# Altium PCB IPO1_V0.01-Pannel.PcbDoc
Units mm, origin at the board's own origin, x right, y up, seen from the top; angles counter-clockwise.
Board outline 159.77 x 279.4 mm, 2 copper layers (Top Layer, Bottom Layer); 6 components, 0 nets, 24 pads, 4 vias.
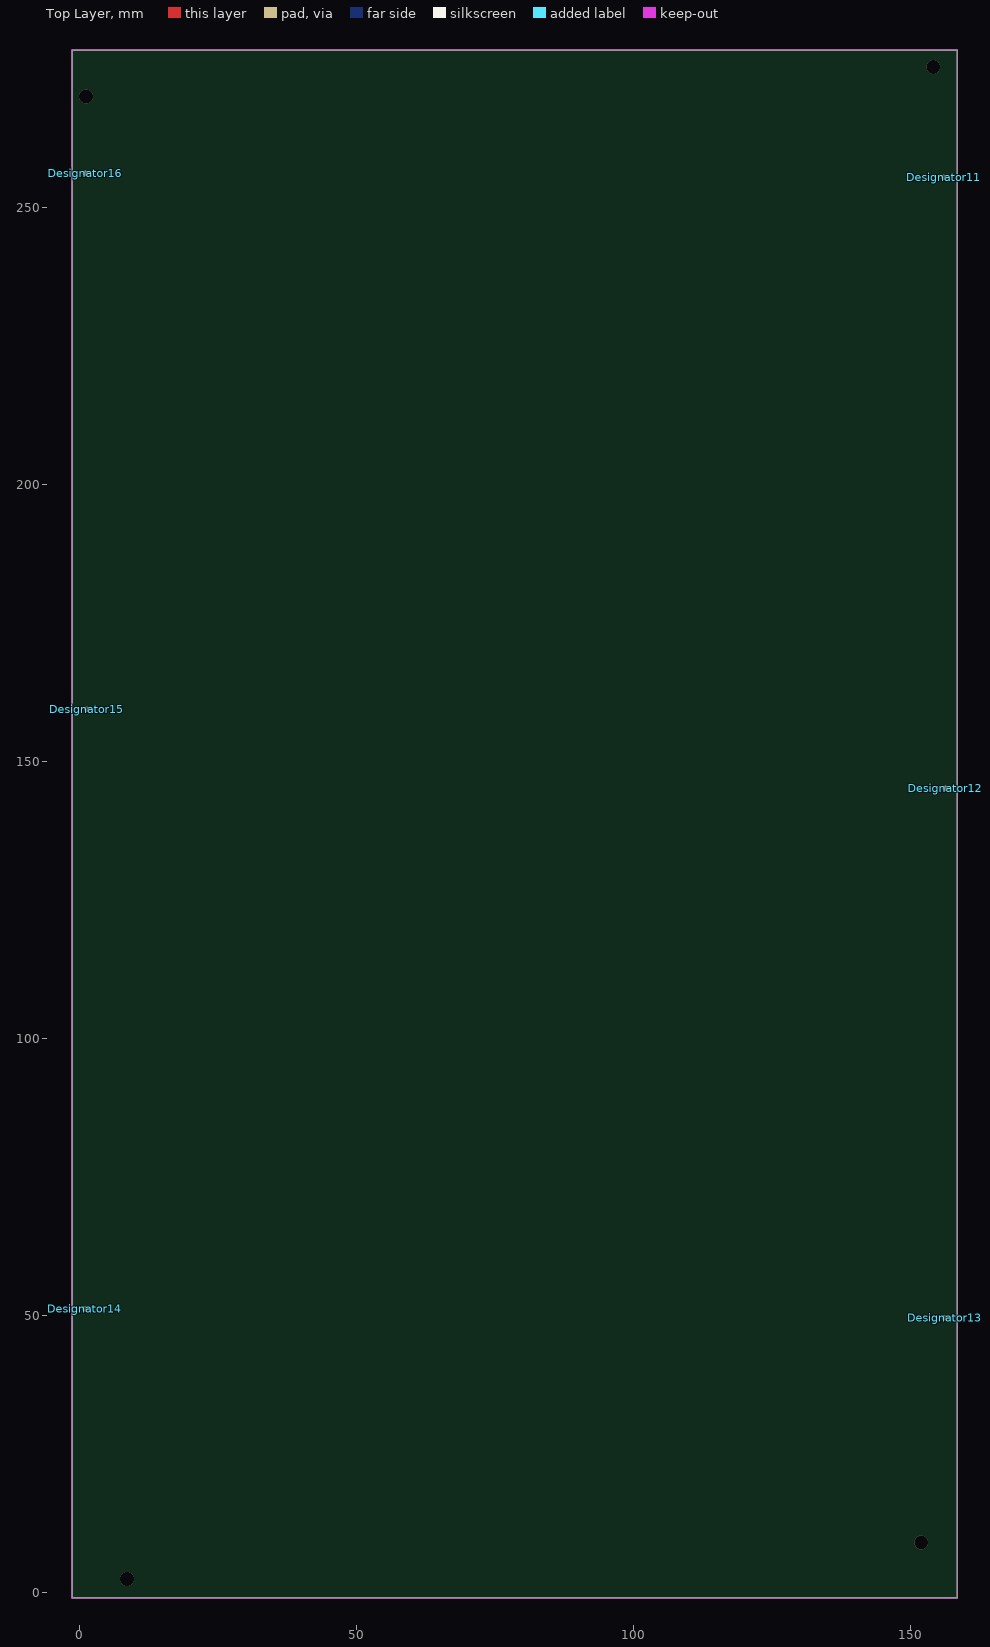
[diagram p0: Top Layer view]
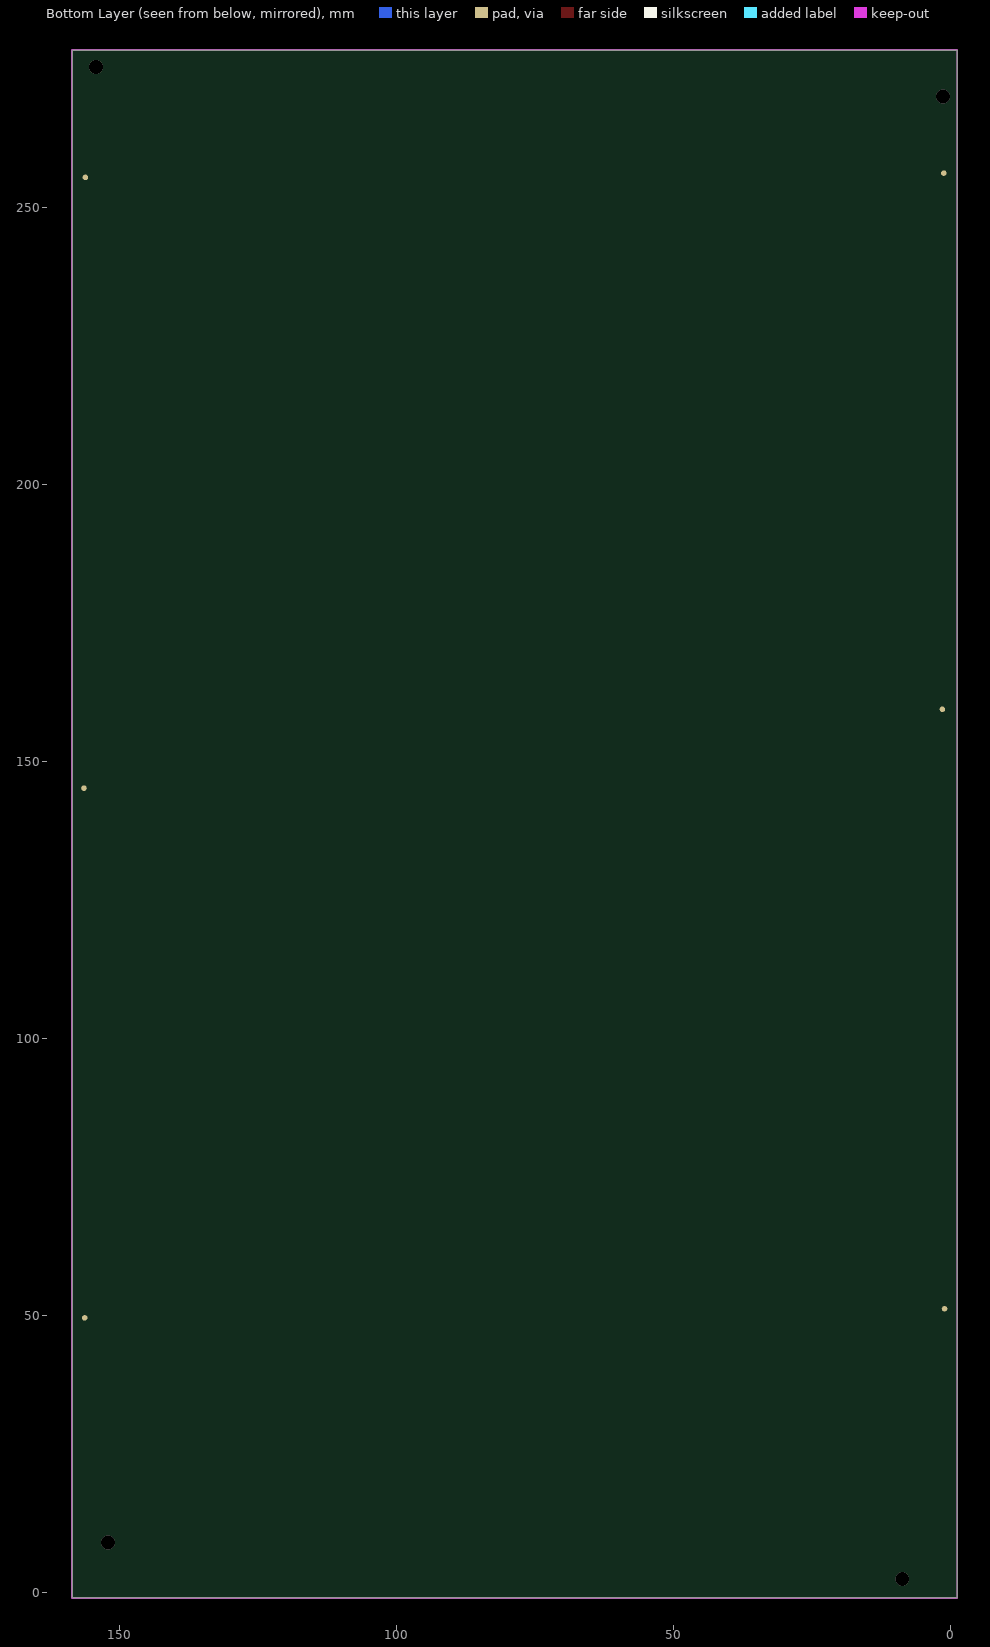
[diagram p1: Bottom Layer view, seen from below]

## Layer stack, top to bottom
Top Solder: solder mask 0.0102, Solder Resist, Dk 3.5
Top Layer: signal copper 0.0356
Dielectric 1: dielectric 0.32, FR-4, Dk 4.8
Bottom Layer: signal copper 0.0356
Bottom Solder: solder mask 0.0102, Solder Resist, Dk 3.5

## Board outline
-1.27,-1.016 -1.27,278.384 158.496,278.384 158.496,-1.016

## Design rules (kind name [scope] priority, off if disabled: settings)
Clearance [All] p1: gap=0.254 ignorepadtopadclearanceinfootprint=FALSE except(0: Arc-Hole Track-Hole SMDPad-Hole THPad-Hole Via-Hole Fill-Hole Poly-Hole Region-Hole Text-Hole)
PolygonConnect [All] p1: connectstyle=Relief reliefconductorwidth=0.254 reliefentries=4 polygonreliefangle="90 Angle" airgapwidth=0.254
RoutingVias [All] p1: holewidth=0.711 width=1.27 viastyle="Through Hole" minholewidth=0.711 minwidth=1.27 maxholewidth=0.711 maxwidth=1.27
SolderMaskExpansion [All] p1: expansion=0.102 istentingtop=FALSE
Width [All] p1: maxlimit=0.254 minlimit=0.254 preferedwidth=0.254
30 further rules are at their usual default settings.

## Components (designator, comment, footprint, x,y, rotation, side; value= is the part's Value field where it differs from the comment)
Designator11 "Comment" Fiducial-2layer 156.083,255.397 r0 top
Designator12 "Comment" Fiducial-2layer 156.337,145.161 r0 top
Designator13 "Comment" Fiducial-2layer 156.21,49.53 r0 top
Designator14 "Comment" Fiducial-2layer 1.016,51.181 r0 top
Designator15 "Comment" Fiducial-2layer 1.397,159.385 r0 top
Designator16 "Comment" Fiducial-2layer 1.143,256.159 r0 top

## Footprints (in the part's own frame and the unit in brackets; to place one, negate y for a bottom-side part, rotate by r counter-clockwise, add the part's x,y. Pads: shape width x height; smd on the part's side, far side on the other; paste and mask are expansions set on the pad)
Fiducial-2layer [mm]
  round 1 smd paste-1 mask+0.8: 25(0,0) 25(0,0)
  round 1 smd far side paste-1 mask+0.8: 25(0,0) 25(0,0)

## Via types
v1: diameter 2.5, hole 2.5, Top Layer to Bottom Layer, 4 vias

## Nets (pads, with @x,y where several pads share a name; then routed paths per layer and width w, separated by ;. In a path a pad name is that pad's centre, name@x,y a point inside that pad or via, vN(x,y) a via of type N, cw(c..) or ccw(c..) an arc to the next point about the centre after c; other vN are vias at no path point)
pads on no net: Designator11.25 Designator12.25 Designator13.25 Designator14.25 Designator15.25 Designator16.25
copper on no net:
  other v1: 8.636,2.413 152.019,9.017 1.27,270.002 154.178,275.336

## Keep-outs
Keep-Out Layer:
  the board outline again, w0.3

## Panel: embedded boards
"IPO1_V0.01.PcbDoc" at 4,4, 3 rows x 1 columns, spacing 91.433 x 153.401, rotation 0